# Altium PCB USER_SW_Breakout.pcbdoc (part 3 of 5)
Units mm, origin at the board's own origin, x right, y up, seen from the top; angles counter-clockwise.
Board outline 125 x 23.5 mm, 2 copper layers (Top Layer, Bottom Layer), stack 0.533 mm thick; 24 components, 16 nets, 4985 pads, 3 vias.
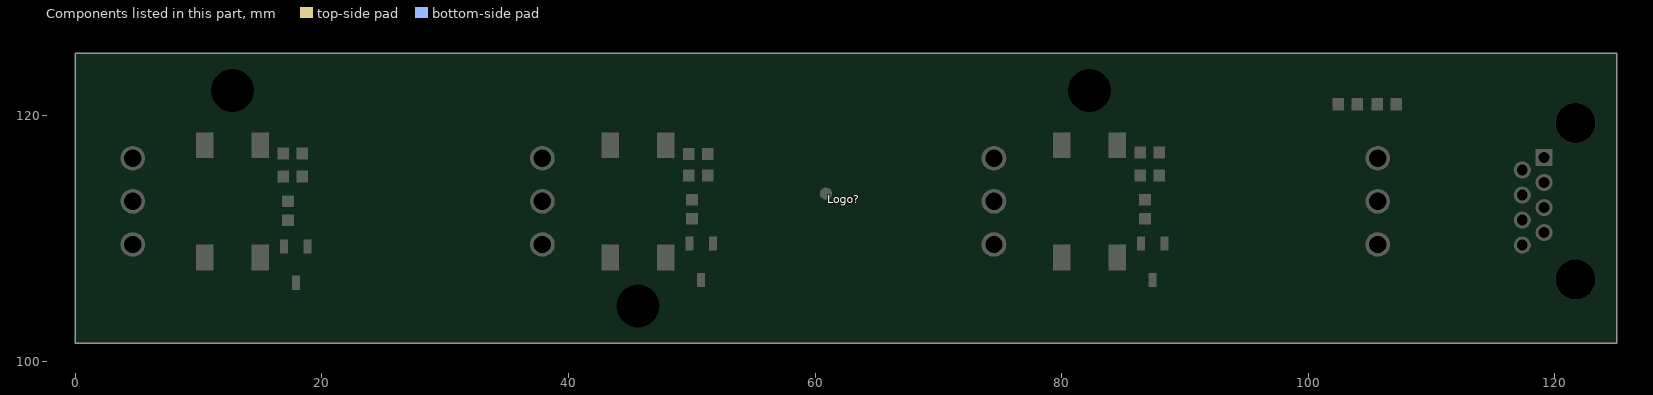
[diagram p3: the components of this part, seen from the top]

## Footprints (in the part's own frame and the unit in brackets; to place one, negate y for a bottom-side part, rotate by r counter-clockwise, add the part's x,y. Pads: shape width x height; smd on the part's side, far side on the other; paste and mask are expansions set on the pad) (continued)
Expatria-Logo [mil] "Expatria DXF logo" (continued)
  round 1.64 on Bottom Overlay: 1(-44058.19,43687.28) 1(-44058.19,43687.28) 1(-44057.74,43705.63) 1(-44057.74,43705.63) 1(-44057.29,43510.14) 1(-44057.29,43510.14) 1(-44057.29,43687.28) 1(-44057.29,43687.28) 1(-44056.84,43533.42) 1(-44056.84,43533.42) 1(-44055.96,43707.41) 1(-44055.96,43707.41) 1(-44054.6,43532.96) 1(-44054.6,43532.96) 1(-44054.6,43707.86) 1(-44054.6,43707.86) 1(-44054.14,43509.72) 1(-44054.14,43509.72) 1(-44054.14,43708.77) 1(-44054.14,43708.77) 1(-44053.27,43691.75) 1(-44053.27,43691.75) 1(-44052.82,43709.19) 1(-44052.82,43709.19) 1(-44052.36,43531.63) 1(-44052.36,43531.63) 1(-44052.36,43691.75) 1(-44052.36,43691.75) 1(-44052.36,43710.1) 1(-44052.36,43710.1) 1(-44051.03,43508.36) 1(-44051.03,43508.36) 1(-44051.03,43710.55) 1(-44051.03,43710.55) 1(-44050.12,43531.18) 1(-44050.12,43531.18) 1(-44049.25,43712.34) 1(-44049.25,43712.34) 1(-44047.89,43529.85) 1(-44047.89,43529.85) 1(-44047.89,43712.79) 1(-44047.89,43712.79) 1(-44047.43,43713.66) 1(-44047.43,43713.66) 1(-44046.1,43507.49) 1(-44046.1,43507.49) 1(-44046.1,43714.12) 1(-44046.1,43714.12) 1(-44045.65,43529.4) 1(-44045.65,43529.4) 1(-44044.78,43699.83) 1(-44044.78,43699.83) 1(-44044.33,43715.9) 1(-44044.33,43715.9) 1(-44043.87,43699.83) 1(-44043.87,43699.83) 1(-44043.41,43528.04) 1(-44043.41,43528.04) 1(-44042.96,43506.13) 1(-44042.96,43506.13) 1(-44042.96,43716.35) 1(-44042.96,43716.35) 1(-44042.08,43717.72) 1(-44042.08,43717.72) 1(-44041.18,43527.62) 1(-44041.18,43527.62) 1(-44040.73,43718.14) 1(-44040.73,43718.14) 1(-44040.31,43719.05) 1(-44040.31,43719.05) 1(-44039.85,43505.67) 1(-44039.85,43505.67) 1(-44038.94,43526.25) 1(-44038.94,43526.25) 1(-44038.94,43719.5) 1(-44038.94,43719.5) 1(-44038.07,43720.83) 1(-44038.07,43720.83) 1(-44037.62,43706.54) 1(-44037.62,43706.54) 1(-44036.71,43504.34) 1(-44036.71,43504.34) 1(-44036.71,43525.8) 1(-44036.71,43525.8) 1(-44036.71,43706.54) 1(-44036.71,43706.54) 1(-44036.71,43721.28) 1(-44036.71,43721.28) 1(-44036.25,43722.19) 1(-44036.25,43722.19) 1(-44034.92,43722.61) 1(-44034.92,43722.61) 1(-44034.47,43723.52) 1(-44034.47,43723.52) 1(-44034.01,43709.65) 1(-44034.01,43709.65) 1(-44033.6,43503.89) 1(-44033.6,43503.89) 1(-44033.14,43709.65) 1(-44033.14,43709.65) 1(-44033.14,43723.97) 1(-44033.14,43723.97) 1(-44033.14,43524.02) 1(-44033.14,43524.02) 1(-44032.69,43724.85) 1(-44032.69,43724.85) 1(-44031.36,43725.3) 1(-44031.36,43725.3) 1(-44030.9,43523.56) 1(-44030.9,43523.56) 1(-44029.54,43727.08) 1(-44029.54,43727.08) 1(-44028.67,43502.11) 1(-44028.67,43502.11) 1(-44028.67,43522.23) 1(-44028.67,43522.23) 1(-44028.21,43727.54) 1(-44028.21,43727.54) 1(-44026.43,43521.78) 1(-44026.43,43521.78) 1(-44026.43,43729.32) 1(-44026.43,43729.32) 1(-44025.53,43501.65) 1(-44025.53,43501.65) 1(-44025.07,43729.77) 1(-44025.07,43729.77) 1(-44024.65,43730.68) 1(-44024.65,43730.68) 1(-44024.2,43520.45) 1(-44024.2,43520.45) 1(-44023.74,43719.5) 1(-44023.74,43719.5) 1(-44023.28,43731.14) 1(-44023.28,43731.14) 1(-44022.83,43719.5) 1(-44022.83,43719.5) 1(-44021.96,43520) 1(-44021.96,43520) 1(-44021.51,43732.92) 1(-44021.51,43732.92) 1(-44021.05,43519.09) 1(-44021.05,43519.09) 1(-44020.18,43722.61) 1(-44020.18,43722.61) 1(-44019.27,43722.61) 1(-44019.27,43722.61) 1(-44018.81,43518.67) 1(-44018.81,43518.67) 1(-44018.36,43734.25) 1(-44018.36,43734.25) 1(-44017.03,43735.61) 1(-44017.03,43735.61) 1(-44016.58,43517.31) 1(-44016.58,43517.31) 1(-44015.7,43736.03) 1(-44015.7,43736.03) 1(-44015.25,43727.08) 1(-44015.25,43727.08) 1(-44014.79,43498.96) 1(-44014.79,43498.96) 1(-44014.79,43737.39) 1(-44014.79,43737.39) 1(-44014.34,43516.85) 1(-44014.34,43516.85) 1(-44014.34,43727.08) 1(-44014.34,43727.08) 1(-44011.65,43739.17) 1(-44011.65,43739.17) 1(-44010.78,43497.18) 1(-44010.78,43497.18) 1(-44010.78,43515.07) 1(-44010.78,43515.07) 1(-44010.78,43731.14) 1(-44010.78,43731.14) 1(-44009.87,43731.14) 1(-44009.87,43731.14) 1(-44009.87,43735.61) 1(-44009.87,43735.61) 1(-44009.42,43732.92) 1(-44009.42,43732.92) 1(-44009.42,43735.61) 1(-44009.42,43735.61) 1(-44009.42,43732.47) 1(-44009.42,43732.47) 1(-44009,43733.37) 1(-44009,43733.37) 1(-44009,43738.72) 1(-44009,43738.72) 1(-44008.54,43514.62) 1(-44008.54,43514.62) 1(-44008.54,43732.47) 1(-44008.54,43732.47) 1(-44008.54,43738.72) 1(-44008.54,43738.72) 1(-44008.08,43740.08) 1(-44008.08,43740.08) 1(-44006.3,43513.29) 1(-44006.3,43513.29) 1(-44004.07,43512.83) 1(-44004.07,43512.83) 1(-44003.16,43511.96) 1(-44003.16,43511.96) 1(-44002.29,43495.85) 1(-44002.29,43495.85) 1(-44000.92,43494.94) 1(-44000.92,43494.94) 1(-44000.92,43511.51) 1(-44000.92,43511.51) 1(-43997.81,43494.49) 1(-43997.81,43494.49) 1(-43997.81,43509.72) 1(-43997.81,43509.72) 1(-43995.57,43509.27) 1(-43995.57,43509.27) 1(-43993.76,43507.91) 1(-43993.76,43507.91) 1(-43991.52,43507.49) 1(-43991.52,43507.49) 1(-43990.65,43506.58) 1(-43990.65,43506.58) 1(-43988.41,43506.13) 1(-43988.41,43506.13) 1(-43986.18,43504.8) 1(-43986.18,43504.8) 1(-43983.94,43504.34) 1(-43983.94,43504.34) 1(-43981.25,43490.47) 1(-43981.25,43490.47) 1(-43976.77,43500.32) 1(-43976.77,43500.32) 1(-43974.54,43499.87) 1(-43974.54,43499.87) 1(-43973.63,43498.96) 1(-43973.63,43498.96) 1(-43971.39,43498.54) 1(-43971.39,43498.54) 1(-43968.74,43487.36) 1(-43968.74,43487.36) 1(-43967.83,43496.31) 1(-43967.83,43496.31) 1(-43964.68,43495.4) 1(-43964.68,43495.4) 1(-43961.57,43493.16) 1(-43961.57,43493.16) 1(-43957.55,43486) 1(-43957.55,43486) 1(-43957.55,43491.38) 1(-43957.55,43491.38) 1(-43954.87,43488.69) 1(-43954.87,43488.69) 1(-43954.41,43486.91) 1(-43954.41,43486.91)